# EAGLE board board_L1 (EAGLE 4.16)

Size 160 x 100 mm. Coordinates in mm from the lower left corner, seen from the top.
Outline: 0,0 160,0 160,100 0,100 0,0
Copper layers (1*16): Top 0.035mm / dielectric 1.5mm / Bottom 0.035mm
Design rules "default": minimum track width 10mil, minimum drill 24mil, track to track 8mil, track to pad 8mil, pad to pad 8mil, via to via 8mil, smd to smd 8mil, copper to edge 40mil, drill to drill 8mil, minimum pad ring 10mil, minimum via ring 8mil, stop-mask expansion 4mil, vias tented up to drill 0mil, thermal gap 10mil
Net classes: 0 default: width 0.61 mm

## Footprints (pad centres in the part's own frame; a part is rotated, then mirrored left to right if it is on the bottom)
C0402 = smd 0.7 x 0.9: 1 -0.65,0; 2 0.65,0
B/3528-21W = smd 2.15 x 1.8: + 1.625,0; - -1.625,0
FOX = drill 0.8 pad 1.93 round: J6.1 67.31,0; J6.2 69.85,0; J6.3 67.31,-2.54; J6.4 69.85,-2.54; J6.5 67.31,-5.08; J6.6 69.85,-5.08; J6.7 67.31,-7.62; J6.8 69.85,-7.62; J6.9 67.31,-10.16; J6.10 69.85,-10.16; J6.11 67.31,-12.7; J6.12 69.85,-12.7; J6.13 67.31,-15.24; J6.14 69.85,-15.24; J6.15 67.31,-17.78; J6.16 69.85,-17.78; J6.17 67.31,-20.32; J6.18 69.85,-20.32; J6.19 67.31,-22.86; J6.20 69.85,-22.86; J6.21 67.31,-25.4; J6.22 69.85,-25.4; J6.23 67.31,-27.94; J6.24 69.85,-27.94; J6.25 67.31,-30.48; J6.26 69.85,-30.48; J6.27 67.31,-33.02; J6.28 69.85,-33.02; J6.29 67.31,-35.56; J6.30 69.85,-35.56; J6.31 67.31,-38.1; J6.32 69.85,-38.1; J6.33 67.31,-40.64; J6.34 69.85,-40.64; J6.35 67.31,-43.18; J6.36 69.85,-43.18; J6.37 67.31,-45.72; J6.38 69.85,-45.72; J6.39 67.31,-48.26; J6.40 69.85,-48.26; J7.1 0,0; J7.2 2.54,0; J7.3 0,-2.54; J7.4 2.54,-2.54; J7.5 0,-5.08; J7.6 2.54,-5.08; J7.7 0,-7.62; J7.8 2.54,-7.62; J7.9 0,-10.16; J7.10 2.54,-10.16; J7.11 0,-12.7; J7.12 2.54,-12.7; J7.13 0,-15.24; J7.14 2.54,-15.24; J7.15 0,-17.78; J7.16 2.54,-17.78; J7.17 0,-20.32; J7.18 2.54,-20.32; J7.19 0,-22.86; J7.20 2.54,-22.86; J7.21 0,-25.4; J7.22 2.54,-25.4; J7.23 0,-27.94; J7.24 2.54,-27.94; J7.25 0,-30.48; J7.26 2.54,-30.48; J7.27 0,-33.02; J7.28 2.54,-33.02; J7.29 0,-35.56; J7.30 2.54,-35.56; J7.31 0,-38.1; J7.32 2.54,-38.1; J7.33 0,-40.64; J7.34 2.54,-40.64; J7.35 0,-43.18; J7.36 2.54,-43.18; J7.37 0,-45.72; J7.38 2.54,-45.72; J7.39 0,-48.26; J7.40 2.54,-48.26
DIL08 = drill 0.813 long: 1 -3.81,-3.81; 2 -1.27,-3.81; 3 1.27,-3.81; 4 3.81,-3.81; 5 3.81,3.81; 6 1.27,3.81; 7 -1.27,3.81; 8 -3.81,3.81
R0805 = smd 1.3 x 1.5: 1 -0.85,0; 2 0.85,0
RTRIM4G/J = smd 1.3 x 1.3: 1 -1.15,-2.75; 3 1.15,-2.75 | smd 2 x 1.3: 2 0,2.75
0309V = drill 0.813 octagon: 1 -1.27,0; 2 1.27,0
0207/10 = drill 0.813 octagon: 1 -5.08,0; 2 5.08,0
0207/5V = drill 0.813 octagon: 1 -2.54,0; 2 2.54,0
0411V = drill 0.914 octagon: 1 -2.54,0; 2 1.27,0
MA03-2 = drill 1.016 round: 1 -2.54,-1.27 | drill 1.016 octagon: 2 -2.54,1.27; 3 0,-1.27; 4 0,1.27; 5 2.54,-1.27; 6 2.54,1.27
MCP3421 = smd 0.635 x 1.27: 1 -0.953,-1.27; 2 0,-1.27; 3 0.953,-1.27; 4 0.953,1.27; 5 0,1.27; 6 -0.953,1.27
MAX6032 = smd 0.66 x 1.27: P$1 0.3,0.6; P$2 1.6,0.6; P$3 2.9,0.6; P$4 4.2,0.6; P$5 4.2,5.57; P$6 2.9,5.57; P$7 1.6,5.57; P$8 0.3,5.57

## Placement (x,y rotation side)
C7  100nF  [C0402]  -112.4,130.01 0 top  (outside the outline)
C8  100nF  [C0402]  -122.56,130.01 0 top  (outside the outline)
C9  100nF  [C0402]  -132.72,130.01 0 top  (outside the outline)
C10  100nF  [C0402]  -142.88,130.01 0 top  (outside the outline)
C12  100nF  [C0402]  -153.04,130.01 0 top  (outside the outline)
C13  100nF  [C0402]  -163.2,130.01 0 top  (outside the outline)
C15  100nF  [C0402]  -173.36,130.01 0 top  (outside the outline)
C16  100nF  [C0402]  -19.69,137.63 0 top  (outside the outline)
C17  100nF  [C0402]  -29.85,137.63 0 top  (outside the outline)
C18  100nF  [C0402]  -40.01,137.63 0 top  (outside the outline)
C19  [B/3528-21W]  -79.38,104.61 0 top  (outside the outline)
C20  100nF  [C0402]  -50.17,137.63 0 top  (outside the outline)
C21  100nF  [C0402]  -60.33,137.63 0 top  (outside the outline)
C22  [B/3528-21W]  -90.81,104.61 0 top  (outside the outline)
C23  100nF  [C0402]  -70.49,137.63 0 top  (outside the outline)
C24  100nF  [C0402]  -80.65,137.63 0 top  (outside the outline)
C25  100nF  [C0402]  -90.81,137.63 0 top  (outside the outline)
C26  100nF  [C0402]  -100.97,137.63 0 top  (outside the outline)
C27  [B/3528-21W]  -102.24,104.61 0 top  (outside the outline)
C28  [B/3528-21W]  -113.67,104.61 0 top  (outside the outline)
IC1  FOX  [FOX]  -88.27,66.51 0 top  (outside the outline)
IC2  MAX412CPA  [DIL08]  -104.78,10.63 0 top  (outside the outline)
IC7  MAX412CPA  [DIL08]  -125.1,10.63 0 top  (outside the outline)
IC8  MAX412CPA  [DIL08]  -145.42,10.63 0 top  (outside the outline)
R4  [R0805]  -43.82,130.01 0 top  (outside the outline)
R5  [R0805]  -55.25,130.01 0 top  (outside the outline)
R6  [RTRIM4G/J]  -160.66,6.82 0 top  (outside the outline)
R7  [0309V]  -55.25,122.39 0 top  (outside the outline)
R8  [0207/10]  -34.93,114.77 0 top  (outside the outline)
R9  [RTRIM4G/J]  -170.82,6.82 0 top  (outside the outline)
R10  [RTRIM4G/J]  -17.15,94.45 0 top  (outside the outline)
R11  [0309V]  -67.95,122.39 0 top  (outside the outline)
R12  [0207/10]  -52.71,114.77 0 top  (outside the outline)
R13  [RTRIM4G/J]  -27.31,94.45 0 top  (outside the outline)
R15  [0207/5V]  -130.18,122.39 0 top  (outside the outline)
R16  5k 1%  [0207/10]  -70.49,114.77 0 top  (outside the outline)
R17  2k2  [0207/10]  -88.27,114.77 0 top  (outside the outline)
R18  5k 1%  [0207/10]  -106.05,114.77 0 top  (outside the outline)
R19  100k 1%  [0207/10]  -123.83,114.77 0 top  (outside the outline)
R20  [0207/5V]  -142.88,122.39 0 top  (outside the outline)
R21  [0207/5V]  -155.58,122.39 0 top  (outside the outline)
R22  [0207/5V]  -168.28,122.39 0 top  (outside the outline)
R23  [0207/5V]  -18.42,130.01 0 top  (outside the outline)
R24  [0207/5V]  -31.12,130.01 0 top  (outside the outline)
R26  10k  [0411V]  -126.37,104.61 0 top  (outside the outline)
R27  [0309V]  -80.65,122.39 0 top  (outside the outline)
R28  [RTRIM4G/J]  -37.47,94.45 0 top  (outside the outline)
R29  10k  [0207/10]  -141.61,114.77 0 top  (outside the outline)
R30  10k  [0207/10]  -159.39,114.77 0 top  (outside the outline)
R31  10k  [0411V]  -139.07,104.61 0 top  (outside the outline)
R32  [RTRIM4G/J]  -47.63,94.45 0 top  (outside the outline)
R33  [RTRIM4G/J]  -57.79,94.45 0 top  (outside the outline)
R34  10k  [0207/10]  -20.96,122.39 0 top  (outside the outline)
R35  10k  [0411V]  -151.77,104.61 0 top  (outside the outline)
R36  [RTRIM4G/J]  -67.95,94.45 0 top  (outside the outline)
R37  10k  [0207/10]  -38.74,122.39 0 top  (outside the outline)
R38  [RTRIM4G/J]  -78.11,94.45 0 top  (outside the outline)
R39  10k  [0411V]  -164.47,104.61 0 top  (outside the outline)
R40  10k  [0411V]  -177.17,104.61 0 top  (outside the outline)
R41  [RTRIM4G/J]  -88.27,94.45 0 top  (outside the outline)
R42  [RTRIM4G/J]  -98.43,94.45 0 top  (outside the outline)
R43  [RTRIM4G/J]  -108.59,94.45 0 top  (outside the outline)
R44  [0309V]  -93.35,122.39 0 top  (outside the outline)
R45  [0309V]  -106.05,122.39 0 top  (outside the outline)
R46  10k  [0411V]  -19.69,114.77 0 top  (outside the outline)
R48  [R0805]  -66.68,130.01 0 top  (outside the outline)
R49  [R0805]  -78.11,130.01 0 top  (outside the outline)
R50  [R0805]  -89.54,130.01 0 top  (outside the outline)
R51  [R0805]  -100.97,130.01 0 top  (outside the outline)
R52  [0309V]  -118.75,122.39 0 top  (outside the outline)
SV7  [MA03-2]  -142.88,93.18 0 top  (outside the outline)
SV8  [MA03-2]  -155.58,93.18 0 top  (outside the outline)
U$2  MCP3421  [MCP3421]  -168.28,91.91 0 top  (outside the outline)
U$3  MCP3421  [MCP3421]  -178.44,91.91 0 top  (outside the outline)
U$4  MAX6032  [MAX6032]  -121.29,90.64 0 top  (outside the outline)
U$5  MCP3421  [MCP3421]  -18.42,105.88 0 top  (outside the outline)
U$6  MAX6032  [MAX6032]  -132.72,90.64 0 top  (outside the outline)
U$7  MCP3421  [MCP3421]  -28.58,105.88 0 top  (outside the outline)
U$9  MCP3421  [MCP3421]  -38.74,105.88 0 top  (outside the outline)
U$10  MCP3421  [MCP3421]  -48.9,105.88 0 top  (outside the outline)
U$11  MCP3421  [MCP3421]  -59.06,105.88 0 top  (outside the outline)
U$12  MCP3421  [MCP3421]  -69.22,105.88 0 top  (outside the outline)

## Library data of the parts
C7-C10 C12 C13 C15-C28 R4-R13 R15-R24 R26-R46 R48-R52 = rcl
IC1 U$2-U$7 U$9-U$12 = aggiunte
IC2 IC7 IC8 = maxim
SV7 SV8 = con-lstb

## Nets
5V: SV7.4 SV7.5 SV8.5
+3V3: IC1.J6.1 IC1.J6.2
+5V: C17.1 C20.1 C21.1 C23.1 C25.1 IC7.8 IC8.8 R4.1 R5.1 R6.1 R10.3 R16.1 R18.1 R28.1 R33.3 R38.3 R42.3 U$4.P$8 U$6.P$8
CH0: IC8.7 R43.2 U$12.1
CH1: IC8.1 R41.2 U$11.1
CH2: IC7.7 R36.2 U$10.1
CH3: IC7.1 R32.2 U$9.1
GND: C7.2 C8.2 C9.2 C10.2 C12.2 C13.2 C15.2 C16.2 C17.2 C18.2 C19.- C20.2 C21.2 C22.- C23.2 C24.2 C25.2 C26.2 C27.- C28.- IC2.3 IC2.5 IC7.3 IC7.5 IC8.3 IC8.5 R21.1 R23.1 U$2.2 U$2.6 U$3.2 U$3.6 U$4.P$4 U$5.2 U$5.6 U$6.P$4 U$7.2 U$7.6 U$9.2 U$9.6 U$10.2 U$10.6 U$11.2 U$11.6 U$12.2 U$12.6
N$1: R30.1
N$2: R17.2 R20.2 U$4.P$7
N$3: R19.2 R22.2 U$6.P$7
N$5: R24.1 R52.2
N$6: R15.2 R27.1
N$7: SV8.4
N$8: R20.1 R21.2
N$9: IC2.1 R9.2 U$2.1
N$10: IC2.7 R13.2 U$3.1
N$13: R27.2 U$4.P$1 U$5.1
N$15: IC1.J7.13 R48.2
N$22: R24.2 U$6.P$1 U$7.1
N$28: R18.2 R19.1 SV8.1
N$29: R16.2 R17.1 SV7.1
N$30: R35.2 R36.1
N$31: R10.2 R11.1
N$33: R40.2 R41.1
N$34: R43.1 R46.2
N$35: R31.2 R32.3
N$37: R15.1 SV7.3
N$38: R52.1 SV8.3
N$53: IC1.J7.21 R49.2
N$54: IC1.J6.38 R51.2
N$58: IC2.2 R7.2 R8.2 R9.3
N$60: R8.1
N$61: IC1.J6.37 R50.2
N$62: R6.2 R7.1
N$63: IC2.6 R11.2 R12.2 R13.1
N$66: R22.1 R23.2
N$69: R12.1
N$113: IC7.2 R29.2 R30.2 R31.1
N$114: IC7.6 R34.2 R35.1 R37.2
N$115: IC8.2 R26.2 R39.2 R40.1
N$116: IC8.6 R44.2 R45.2 R46.1
N$117: R45.1
N$119: R26.1
N$121: R42.2 R44.1
N$122: R38.2 R39.1
N$123: R33.2 R34.1
N$124: R37.1
N$126: R28.2 R29.1
SCL: R5.2 R48.1 R50.1 U$2.3 U$3.3 U$5.3 U$7.3 U$9.3 U$10.3 U$11.3 U$12.3
SD1: IC1.J6.26
SD2: IC1.J6.25
SD5: IC1.J6.23
SD7: IC1.J6.24
SDA: R4.2 R49.1 R51.1 U$2.4 U$3.4 U$5.4 U$7.4 U$9.4 U$10.4 U$11.4 U$12.4
V+: IC2.8
V-: C18.1 C24.1 C26.1 IC2.4 IC7.4 IC8.4 R6.3 R10.1 R28.3 R33.1 R38.1 R42.1
VCC: C7.1 C8.1 C9.1 C10.1 C12.1 C13.1 C15.1 C16.1 C19.+ C22.+ C27.+ C28.+ U$2.5 U$3.5 U$5.5 U$7.5 U$9.5 U$10.5 U$11.5 U$12.5

## Tracks (layer width: path | path; a pad name or v marks a point on that pad's centre or on a via)
5V  (2 unrouted)
+3V3  (1 unrouted)
+5V  (18 unrouted)
CH0  (2 unrouted)
CH1  (2 unrouted)
CH2  (2 unrouted)
CH3  (2 unrouted)
GND  (45 unrouted)
N$2  (2 unrouted)
N$3  (2 unrouted)
N$5  (1 unrouted)
N$6  (1 unrouted)
N$8  (1 unrouted)
N$9  (2 unrouted)
N$10  (2 unrouted)
N$13  (2 unrouted)
N$15  (1 unrouted)
N$22  (2 unrouted)
N$28  (2 unrouted)
N$29  (2 unrouted)
N$30  (1 unrouted)
N$31  (1 unrouted)
N$33  (1 unrouted)
N$34  (1 unrouted)
N$35  (1 unrouted)
N$37  (1 unrouted)
N$38  (1 unrouted)
N$53  (1 unrouted)
N$54  (1 unrouted)
N$58  (3 unrouted)
N$61  (1 unrouted)
N$62  (1 unrouted)
N$63  (3 unrouted)
N$66  (1 unrouted)
N$113  (3 unrouted)
N$114  (3 unrouted)
N$115  (3 unrouted)
N$116  (3 unrouted)
N$121  (1 unrouted)
N$122  (1 unrouted)
N$123  (1 unrouted)
N$126  (1 unrouted)
SCL  (10 unrouted)
SDA  (10 unrouted)
V-  (11 unrouted)
VCC  (19 unrouted)